# Altium PCB PCB1.PcbDoc
Units mil, origin at the board's own origin, x right, y up, seen from the top; angles counter-clockwise.
Board outline 3200 x 1500 mil, 2 copper layers (Top Layer, Bottom Layer), stack 61.756 mil thick; 5 components, 3 nets, 12 pads, 4 vias.
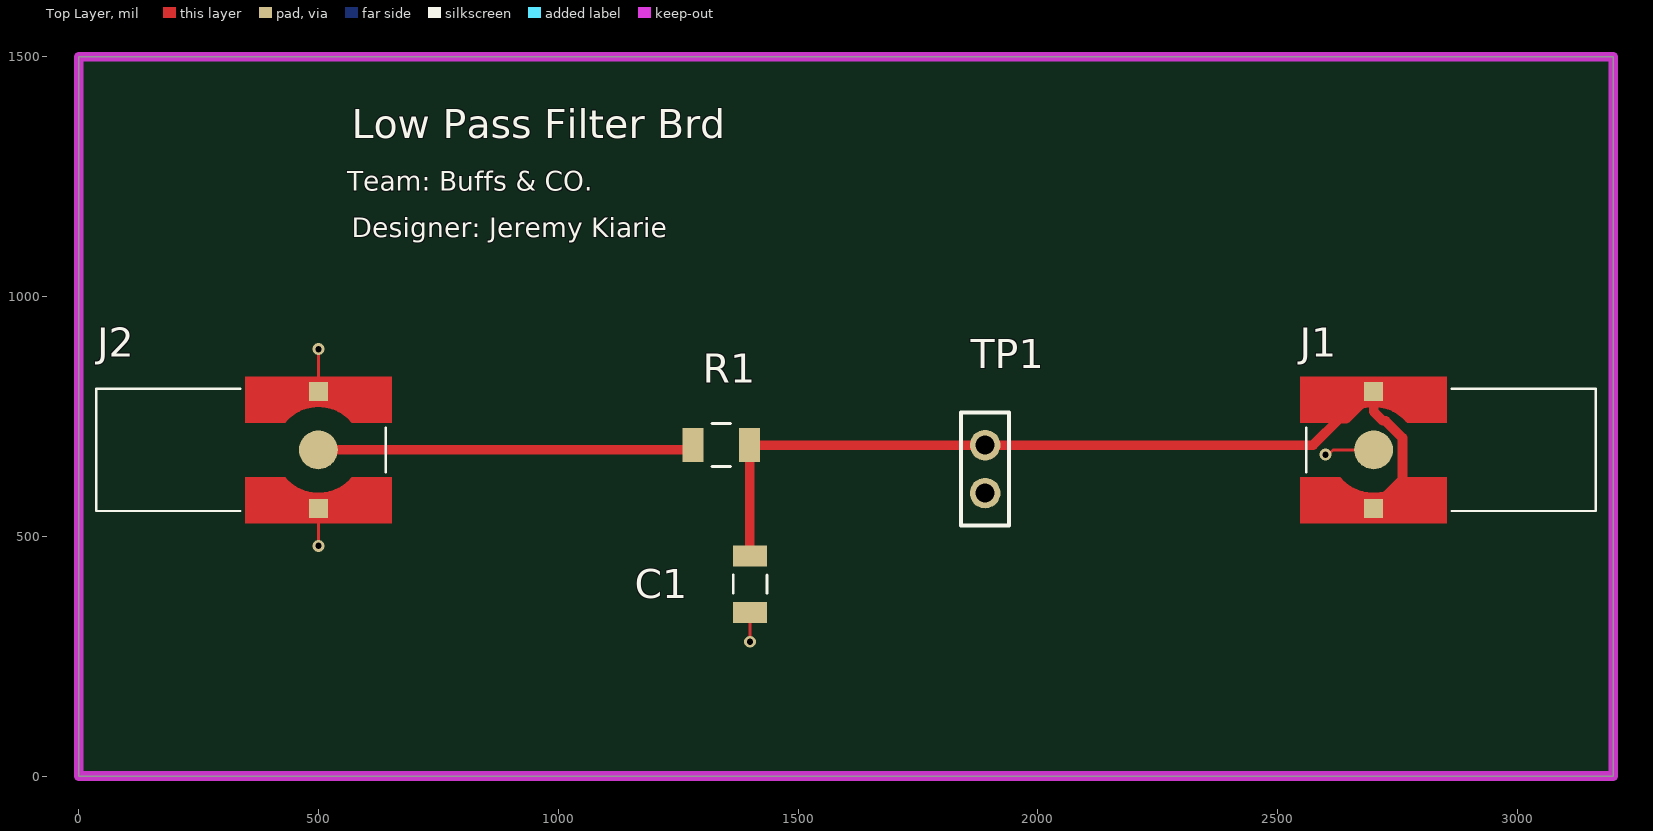
[diagram p0: Top Layer view]
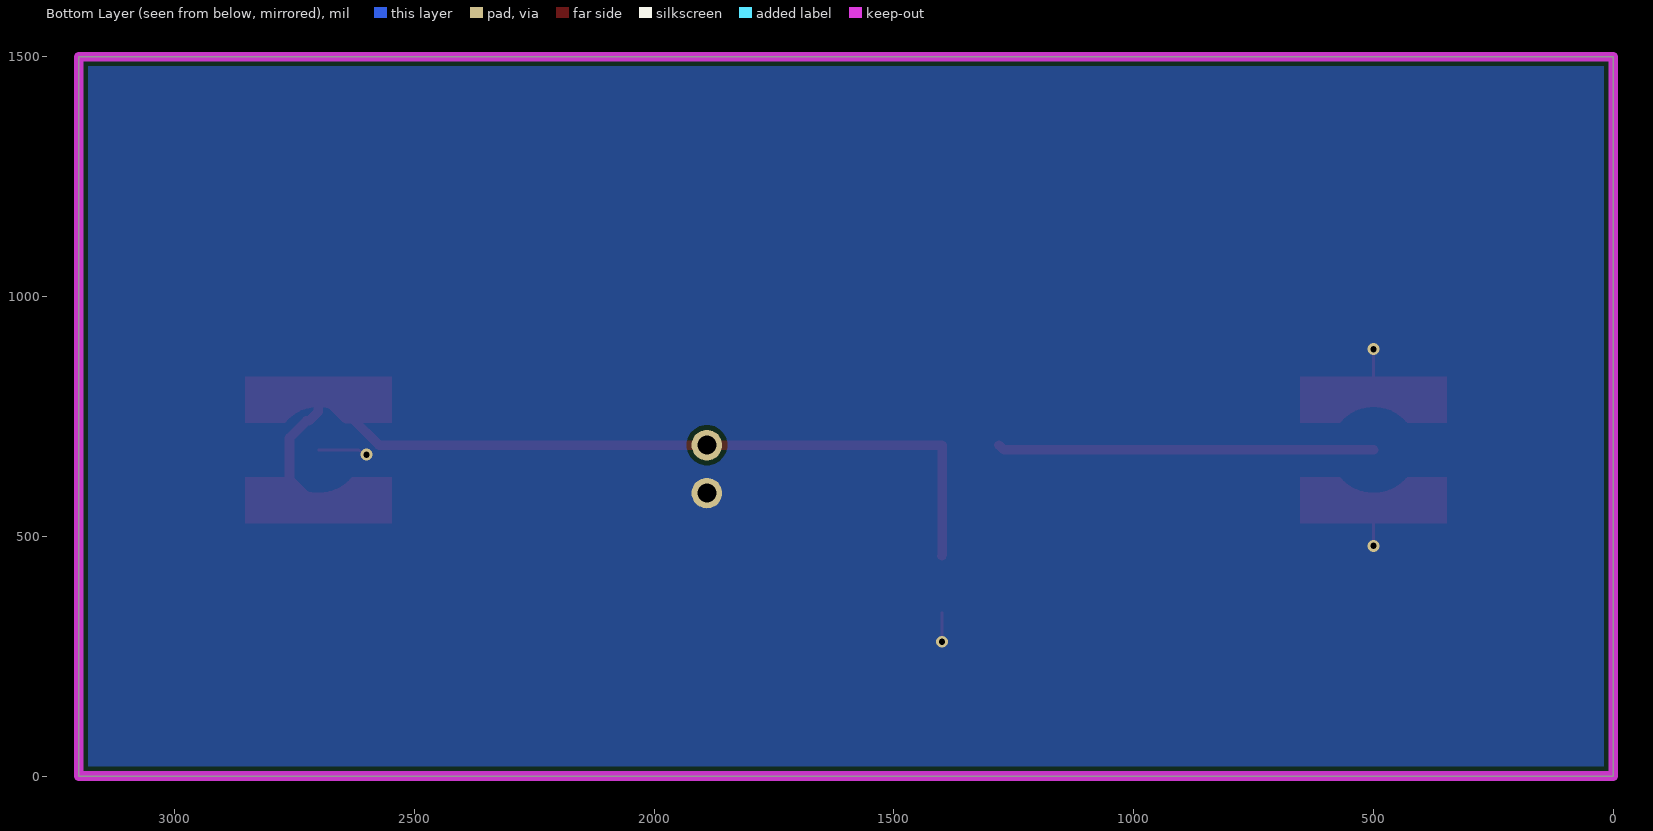
[diagram p1: Bottom Layer view, seen from below]
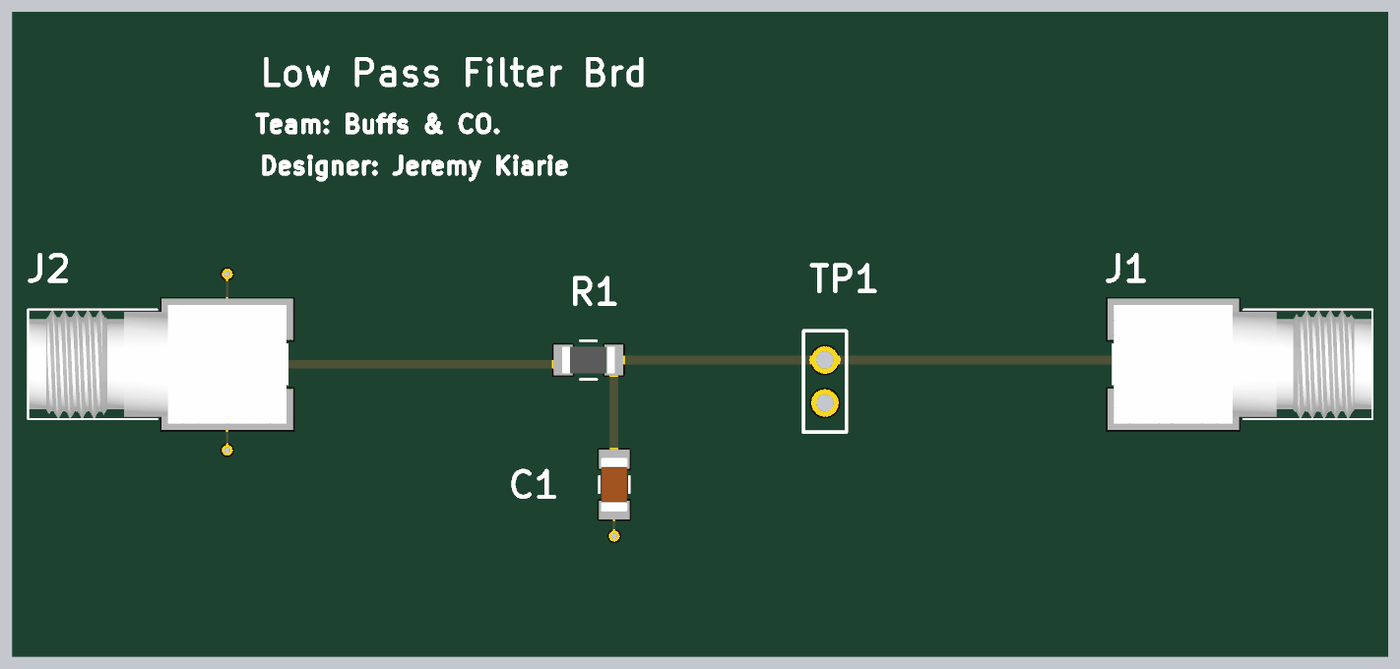
[diagram p2: 3D render of the assembled board from above, using the file's embedded part models]

## Layer stack, top to bottom
Top Solder: solder mask 1, SM-001, Dk 4
Top Layer: signal copper 1.378
Dielectric 1: core 59, Core-043, Dk 4.3
Bottom Layer: signal copper 1.378
Bottom Solder: solder mask 1, SM-001, Dk 4

## Board outline
0,0 3200,0 3200,1500 0,1500

## Design rules (kind name [scope] priority, off if disabled: settings)
Clearance [All] p1: gap=10 ignorepadtopadclearanceinfootprint=FALSE
PlaneClearance [All] p1: clearance=10
PlaneConnect [All] p1: planeconnectstyle=Direct reliefexpansion=20 reliefentries=4 reliefconductorwidth=10 reliefairgap=10
PolygonConnect [All] p1: connectstyle=Direct reliefconductorwidth=10 reliefentries=4 polygonreliefangle="90 Angle" airgapwidth=10
RoutingVias [All] p1: holewidth=13 width=25 viastyle="Through Hole" minholewidth=13 minwidth=25 maxholewidth=60 maxwidth=80
SolderMaskExpansion [All] p1: expansion=4 istentingtop=FALSE
SupplyNets "Schematic Supply Nets" [InNet('GND')] p1: voltage=0.000
UnRoutedNet [All] p1: checkbadconnections=TRUE
Width "Schematic Width Constraint_1" [InNet('NetJ2_1')] p1: maxlimit=100 minlimit=10 preferedwidth=20 minimp=50.000000 maximp=50.000000 favimp=50.000000
Width "Schematic Width Constraint" [InNet('NetC1_2')] p2: maxlimit=100 minlimit=10 preferedwidth=20 minimp=50.000000 maximp=50.000000 favimp=50.000000
Width [All] p3: maxlimit=100 minlimit=6 preferedwidth=6 minimp=50.000000 maximp=50.000000 favimp=50.000000
27 further rules are at their usual default settings.

## Components (designator, comment, footprint, x,y, rotation, side; value= is the part's Value field where it differs from the comment)
C1 "100nF" 1206_Passive_Capacitor 1400,400 r90 top
J1 "CONSMA002-SMD" TE_CONSMA002-SMD 2700,680 r90 top
J2 "CONSMA002-SMD" TE_CONSMA002-SMD 500,680 r270 top
R1 "1k" 1206_Passive_Resitor 1340,690 r0 top value="1K Ohm"
TP1 "10x Probe TP" TP_Diff_Probe 1890,690 r270 top

## Footprints (in the part's own frame and the unit in brackets; to place one, negate y for a bottom-side part, rotate by r counter-clockwise, add the part's x,y. Pads: shape width x height; smd on the part's side, far side on the other; paste and mask are expansions set on the pad)
1206_Passive_Capacitor [mil]
  rect 44x71 smd: 1(-59,0) 2(59,0)
  silkscreen extent -19,-35 19,35, body extent -63,-31 63,32, height 50
1206_Passive_Resitor [mil]
  rect 44x71 smd: 1(-59,0) 2(59,0)
  silkscreen extent -19,-45 19,45, body extent -61,-31 61,31, height 26
TE_CONSMA002-SMD [mm]
  round 2.05 smd: 1(0,0)
  rect 1x1 smd paste-1 mask+0: 2(-3.1,0) 3(3.1,0)
  Top Layer region: 3.88,-3.88 1.44,-3.88 1.44,-1.77 1.503,-1.716 1.553,-1.67 1.601,-1.623 1.648,-1.575 1.694,-1.525 1.738,-1.474 1.78,-1.422 1.821,-1.368 1.861,-1.314 1.899,-1.258 1.935,-1.201 1.97,-1.143 2.002,-1.084 2.033,-1.025 2.063,-0.964 2.09,-0.902 2.116,-0.84 2.14,-0.777 2.162,-0.713 2.183,-0.649 2.201,-0.584 2.218,-0.519 2.232,-0.453 2.245,-0.387 2.256,-0.32 2.264,-0.253 2.271,-0.186 2.276,-0.119 2.279,-0.052 2.28,0 2.279,0.052 2.276,0.119 2.271,0.186 2.264,0.253 2.256,0.32 2.245,0.387 2.232,0.453 2.218,0.519 2.201,0.584 2.183,0.649 2.162,0.713 2.14,0.777 2.116,0.84 2.09,0.902 2.063,0.964 2.033,1.025 2.002,1.084 1.97,1.143 1.935,1.201 1.899,1.258 1.861,1.314 1.821,1.368 1.78,1.422 1.738,1.474 1.694,1.525 1.648,1.575 1.601,1.623 1.553,1.67 1.503,1.716 1.44,1.77 1.44,2.35 1.44,3.88 3.88,3.88
  Top Layer region: -1.44,1.77 -1.503,1.716 -1.553,1.67 -1.601,1.623 -1.648,1.575 -1.694,1.525 -1.738,1.474 -1.78,1.422 -1.821,1.368 -1.861,1.314 -1.899,1.258 -1.935,1.201 -1.97,1.143 -2.002,1.084 -2.033,1.025 -2.063,0.964 -2.09,0.902 -2.116,0.84 -2.14,0.777 -2.162,0.713 -2.183,0.649 -2.201,0.584 -2.218,0.519 -2.232,0.453 -2.245,0.387 -2.256,0.32 -2.264,0.253 -2.271,0.186 -2.276,0.119 -2.279,0.052 -2.28,0 -2.279,-0.052 -2.276,-0.119 -2.271,-0.186 -2.264,-0.253 -2.256,-0.32 -2.245,-0.387 -2.232,-0.453 -2.218,-0.519 -2.201,-0.584 -2.183,-0.649 -2.162,-0.713 -2.14,-0.777 -2.116,-0.84 -2.09,-0.902 -2.063,-0.964 -2.033,-1.025 -2.002,-1.084 -1.97,-1.143 -1.935,-1.201 -1.899,-1.258 -1.861,-1.314 -1.821,-1.368 -1.78,-1.422 -1.738,-1.474 -1.694,-1.525 -1.648,-1.575 -1.601,-1.623 -1.553,-1.67 -1.503,-1.716 -1.44,-1.77 -1.44,-3.88 -3.88,-3.88 -3.88,3.88 -1.44,3.88
  silkscreen extent -3.24,-11.76 3.24,3.56, body extent -3.5,-11.7 3.5,3.5, height 10.8
TP_Diff_Probe [mm]
  round 1.62 hole 1.02: 1(0,0) 2(2.54,0)
  silkscreen extent -1.72,-1.27 4.26,1.26

## Part data
C1: library part C_100nF_1206, "100nF ±5% 50V C0G 1206 Multilayer Ceramic Capacitors MLCC - SMD/SMT RoHS", LCSC Part#=C21812, MFR Part #=GRM31M5C1H473JA01L, Datasheet=https://datasheet.lcsc.com/lcsc/1810201313_Murata-Electronics-GRM31M5C1H473JA01L_C21812.pdf, Type=Extended
J1 J2: Package=None, Availability=Unavailable, MP=CONSMA002-SMD, Price=None
R1: library part R_1K_1206, "CHIP RESISTOR - SURFACE MOUNT 1KOHMS ±1% 1/4W 1206 ROHS", LCSC Part#=C4410, MFR Part #=RNCP1206FTD1K00CT, Digikey Link=https://www.digikey.com/product-detail/en/RNCP1206FTD1K00/RNCP1206FTD1K00CT-ND/2240675/?itemSeq=304982373, Type=Basic
TP1: library part TP_Diff_Probe, "Test Point 300 mil centers"

## Via types
v1: diameter 25, hole 13, Top Layer to Bottom Layer, 4 vias

## Nets (pads, with @x,y where several pads share a name; then routed paths per layer and width w, separated by ;. In a path a pad name is that pad's centre, name@x,y a point inside that pad or via, vN(x,y) a via of type N, cw(c..) or ccw(c..) an arc to the next point about the centre after c; other vN are vias at no path point)
GND: C1.1 J1.1 J2.2 J2.3 TP1.2 | length 331
  Top Layer w6: v1(500,480) J2.3 ; J2.2 v1(500,890) ; v1(1400,280) C1.1 ; v1(2600,670) 2605.14,670 2615.14,680 J1.1
NetC1_2: C1.2 J1.2 J1.3 R1.2 TP1.1 | length 1876.1
  Top Layer w20: C1.2 1399,460 R1.2 TP1.1 2574.04,690 2629.41,745.37 2643.32,745.37 J1.3 2700,760 2719.65,740.35 2725,740.35 2760.35,705 2760.35,618.31 J1.2
NetJ2_1: J2.1 R1.1 | length 785.1
  Top Layer w20: J2.1 1271,680 R1.1

## Polygon pours and split planes (outlines as drawn)
GND on Bottom Layer "GND_L02_P000" (solid, pour order 0): 0,1500 3200,1500 3200,0 0,0

## Keep-outs
Keep-Out Layer:
  the board outline again, w20

## Silkscreen, mask and mechanical layers (free items; w line width, h text height)
Top Overlay:
  text "Low Pass Filter Brd" at 570,1330 h60
  text "Team: Buffs & CO." at 560,1220 h40
  text "Designer: Jeremy Kiarie" at 570,1123.33 h40